# EAGLE board 555 alarm system (EAGLE 5.11)
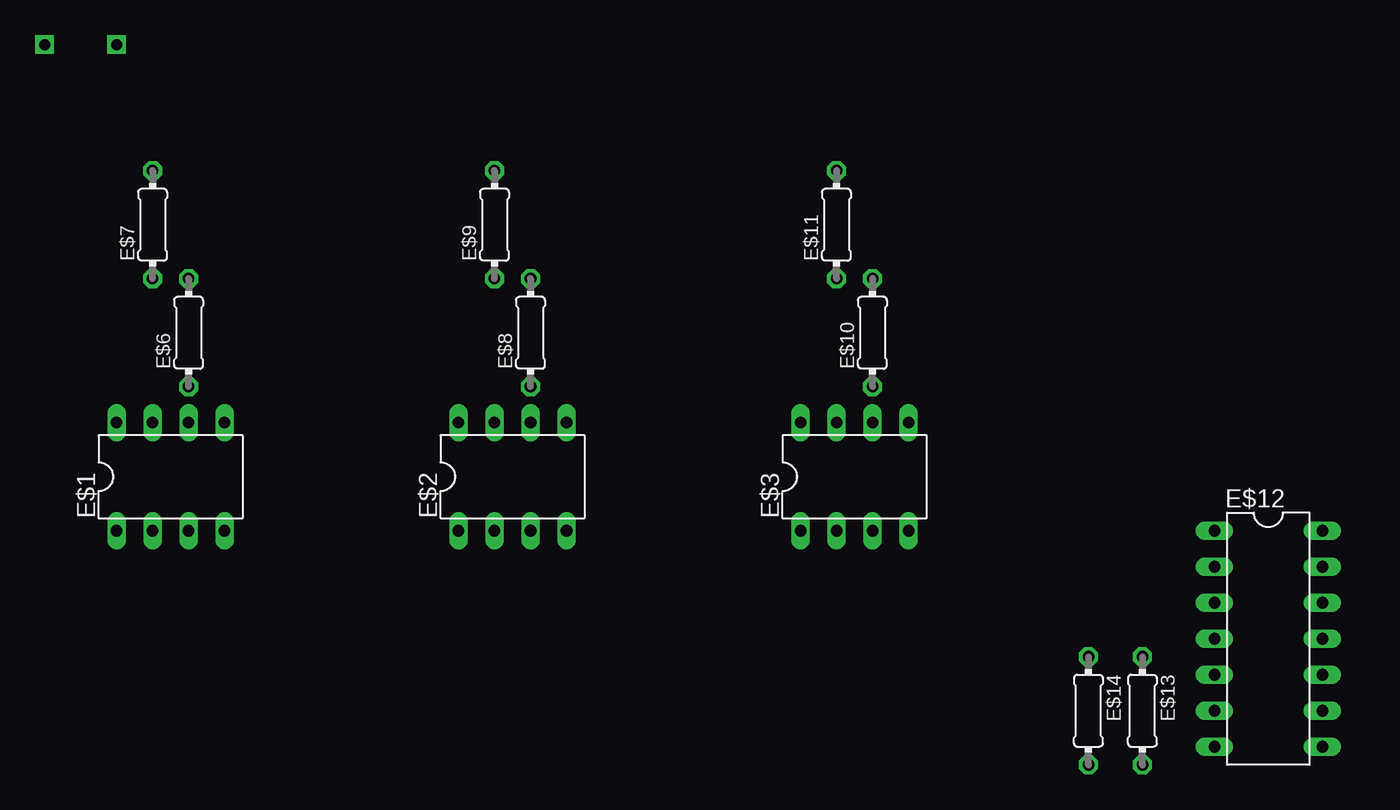
[diagram p0: board, top side]
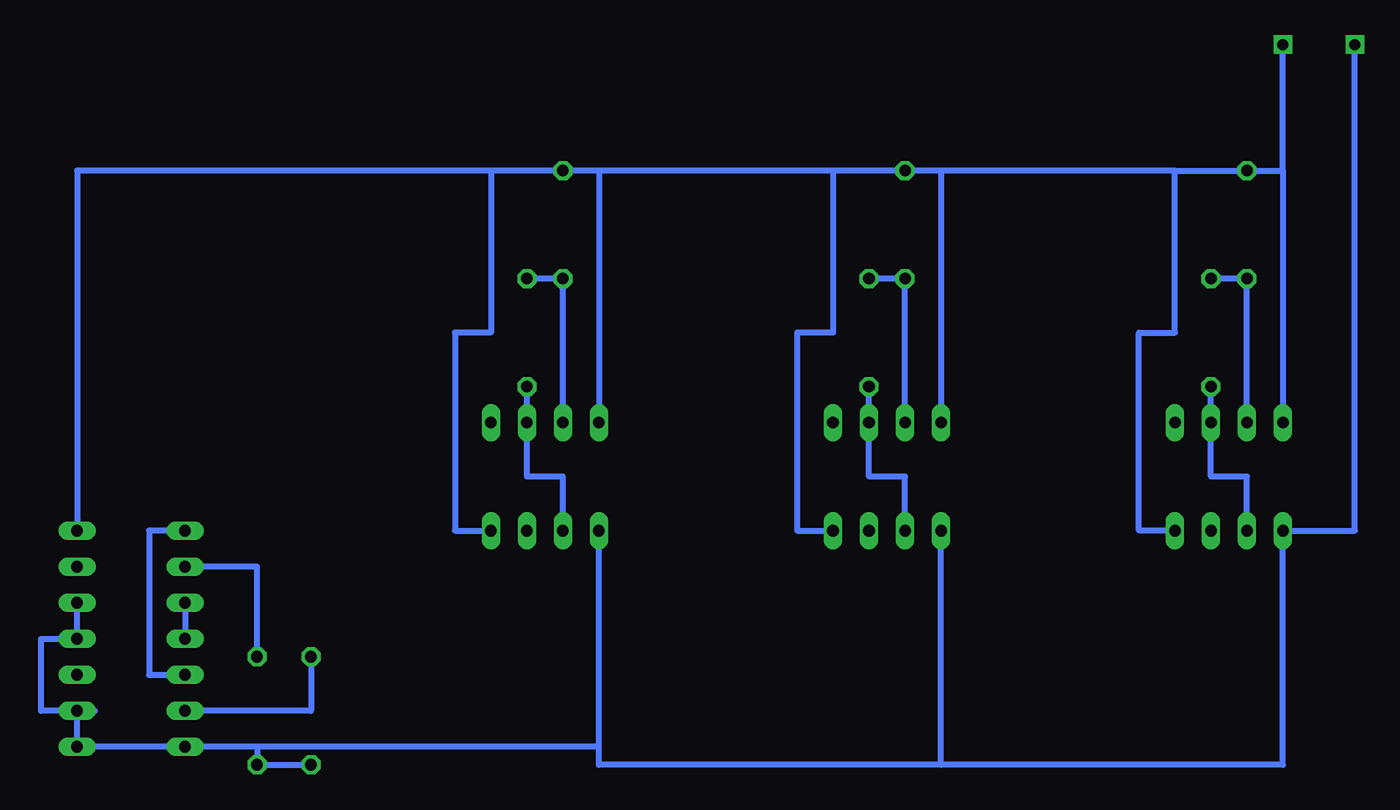
[diagram p1: board, bottom side, seen from below]

No outline drawn. Coordinates in mm, seen from the top.
Copper layers (1*16): Top 0.035mm / dielectric 1.5mm / Bottom 0.035mm
Design rules "default": minimum track width 10mil, minimum drill 24mil, track to track 8mil, track to pad 8mil, pad to pad 8mil, via to via 8mil, smd to smd 8mil, copper to edge 40mil, drill to drill 8mil, minimum pad ring 10mil, minimum via ring 8mil, stop-mask expansion 4mil, vias tented up to drill 0mil, thermal gap 10mil

## Footprints (pad centres in the part's own frame; a part is rotated, then mirrored left to right if it is on the bottom)
DIL08 = drill 0.813 long: 1 -3.81,-3.81; 2 -1.27,-3.81; 3 1.27,-3.81; 4 3.81,-3.81; 5 3.81,3.81; 6 1.27,3.81; 7 -1.27,3.81; 8 -3.81,3.81
+5V = drill 0.8 square: P$1 0,0
GND = drill 0.8 square: P$1 0,0
0204/7 = drill 0.813 octagon: 1 -3.81,0; 2 3.81,0
DIL14 = drill 0.813 long: 1 -7.62,-3.81; 2 -5.08,-3.81; 3 -2.54,-3.81; 4 0,-3.81; 5 2.54,-3.81; 6 5.08,-3.81; 7 7.62,-3.81; 8 7.62,3.81; 9 5.08,3.81; 10 2.54,3.81; 11 0,3.81; 12 -2.54,3.81; 13 -5.08,3.81; 14 -7.62,3.81

## Placement (x,y rotation side)
E$1  [DIL08]  15.24,41.91 0 top
E$2  [DIL08]  39.37,41.91 0 top
E$3  [DIL08]  63.5,41.91 0 top
E$4  [+5V]  11.43,72.39 0 top
E$5  [GND]  6.35,72.39 0 top
E$6  [0204/7]  16.51,52.07 90 top
E$7  [0204/7]  13.97,59.69 90 top
E$8  [0204/7]  40.64,52.07 90 top
E$9  [0204/7]  38.1,59.69 90 top
E$10  [0204/7]  64.77,52.07 90 top
E$11  [0204/7]  62.23,59.69 90 top
E$12  [DIL14]  92.71,30.48 270 top
E$13  [0204/7]  83.82,25.4 270 top
E$14  [0204/7]  80.01,25.4 270 top

## Library data of the parts
E$1-E$3 E$12 = 40xx
E$4 E$5 = 001 Custom Lib.
E$6-E$11 E$13 E$14 = rcl

## Nets
S$1: E$1.4 E$1.8 E$2.4 E$2.8 E$3.4 E$3.8 E$4.P$1 E$7.2 E$9.2 E$11.2 E$12.14
S$2: E$12.2 E$13.1
S$3: E$1.2 E$1.6 E$6.1
S$4: E$2.2 E$2.6 E$8.1
S$5: E$3.2 E$3.6 E$10.1
S$6: E$1.7 E$6.2 E$7.1
S$7: E$2.7 E$8.2 E$9.1
S$8: E$3.7 E$10.2 E$11.1
S$9: E$12.1 E$12.5
S$10: E$12.8 E$12.9 E$12.11 E$12.12
S$11: E$12.3 E$12.4
S$12: E$1.1 E$2.1 E$3.1 E$5.P$1 E$12.7 E$13.2 E$14.2
S$13: E$12.6 E$14.1

## Tracks (layer width: path | path; a pad name or v marks a point on that pad's centre or on a via)
S$1
  Bottom 0.406: 59.69,63.5 E$3.8 | 59.69,63.5 E$11.2 67.31,63.5 | 43.18,63.5 E$9.2 35.56,63.5 | 43.18,63.5 59.69,63.5 | 35.56,63.5 E$2.8 | 19.05,63.5 E$7.2 11.43,63.5 | 19.05,63.5 35.56,63.5 | 11.43,63.5 E$4.P$1 | 11.43,63.5 E$1.8 | E$1.4 21.59,38.1 21.59,52.07 19.05,52.07 19.05,63.5 | E$2.4 45.72,38.1 45.72,52.07 43.18,52.07 43.18,63.5 | E$3.4 69.85,38.1 69.85,52.07 67.31,52.07 67.31,63.5 | E$12.14 96.52,63.5 67.31,63.5
S$2
  Bottom 0.406: E$13.1 83.82,35.56 E$12.2
S$3
  Bottom 0.406: E$1.2 13.97,41.91 16.51,41.91 E$1.6 E$6.1
S$4
  Bottom 0.406: E$2.2 38.1,41.91 40.64,41.91 E$2.6 E$8.1
S$5
  Bottom 0.406: E$3.2 62.23,41.91 64.77,41.91 E$3.6 E$10.1
S$6
  Bottom 0.406: E$6.2 E$7.1 E$1.7
S$7
  Bottom 0.406: E$2.7 E$9.1 E$8.2
S$8
  Bottom 0.254: E$3.7 62.23,46.99
  Bottom 0.406: E$10.2 E$11.1 62.23,46.99
S$9
  Bottom 0.406: E$12.1 91.44,38.1 91.44,27.94 E$12.5
S$10
  Bottom 0.406: E$12.12 E$12.11 99.06,30.48 99.06,25.4 E$12.9 | E$12.9 95.25,25.4 | E$12.8 E$12.9
S$11
  Bottom 0.406: E$12.3 E$12.4
S$12
  Bottom 0.406: 35.56,21.59 11.43,21.59 E$1.1 6.35,38.1 E$5.P$1 | 35.56,21.59 E$2.1 | 59.69,22.86 59.69,21.59 35.56,21.59 | 59.69,22.86 E$3.1 | 96.52,22.86 E$12.7 83.82,22.86 | 59.69,22.86 83.82,22.86 | E$14.2 E$13.2 83.82,22.86
S$13
  Bottom 0.406: E$14.1 80.01,25.4 E$12.6

## Text on the board
Unrouted: GND | +5V | 4.7K | 4.7K | 4.7K | 10K | 10K | 10K | 555 | 555 | 555 | 74HC02